# EAGLE board moodlight (EAGLE 6.5.0)
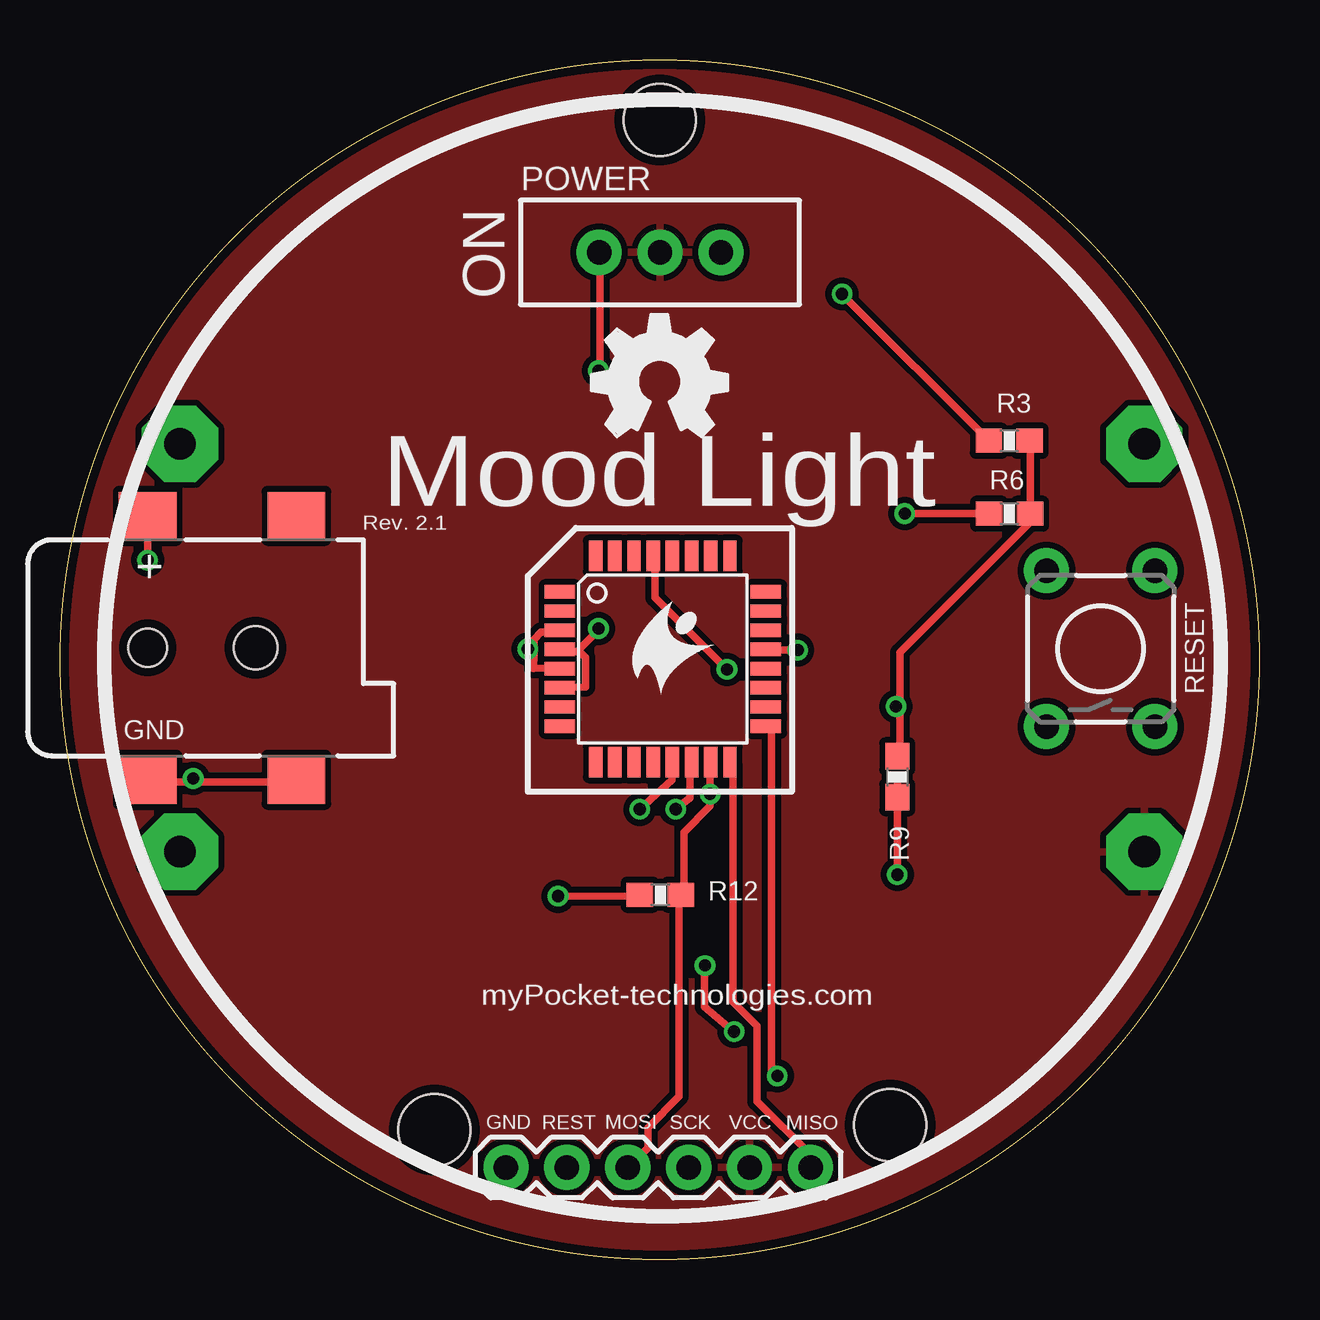
[diagram p0: board, top side]
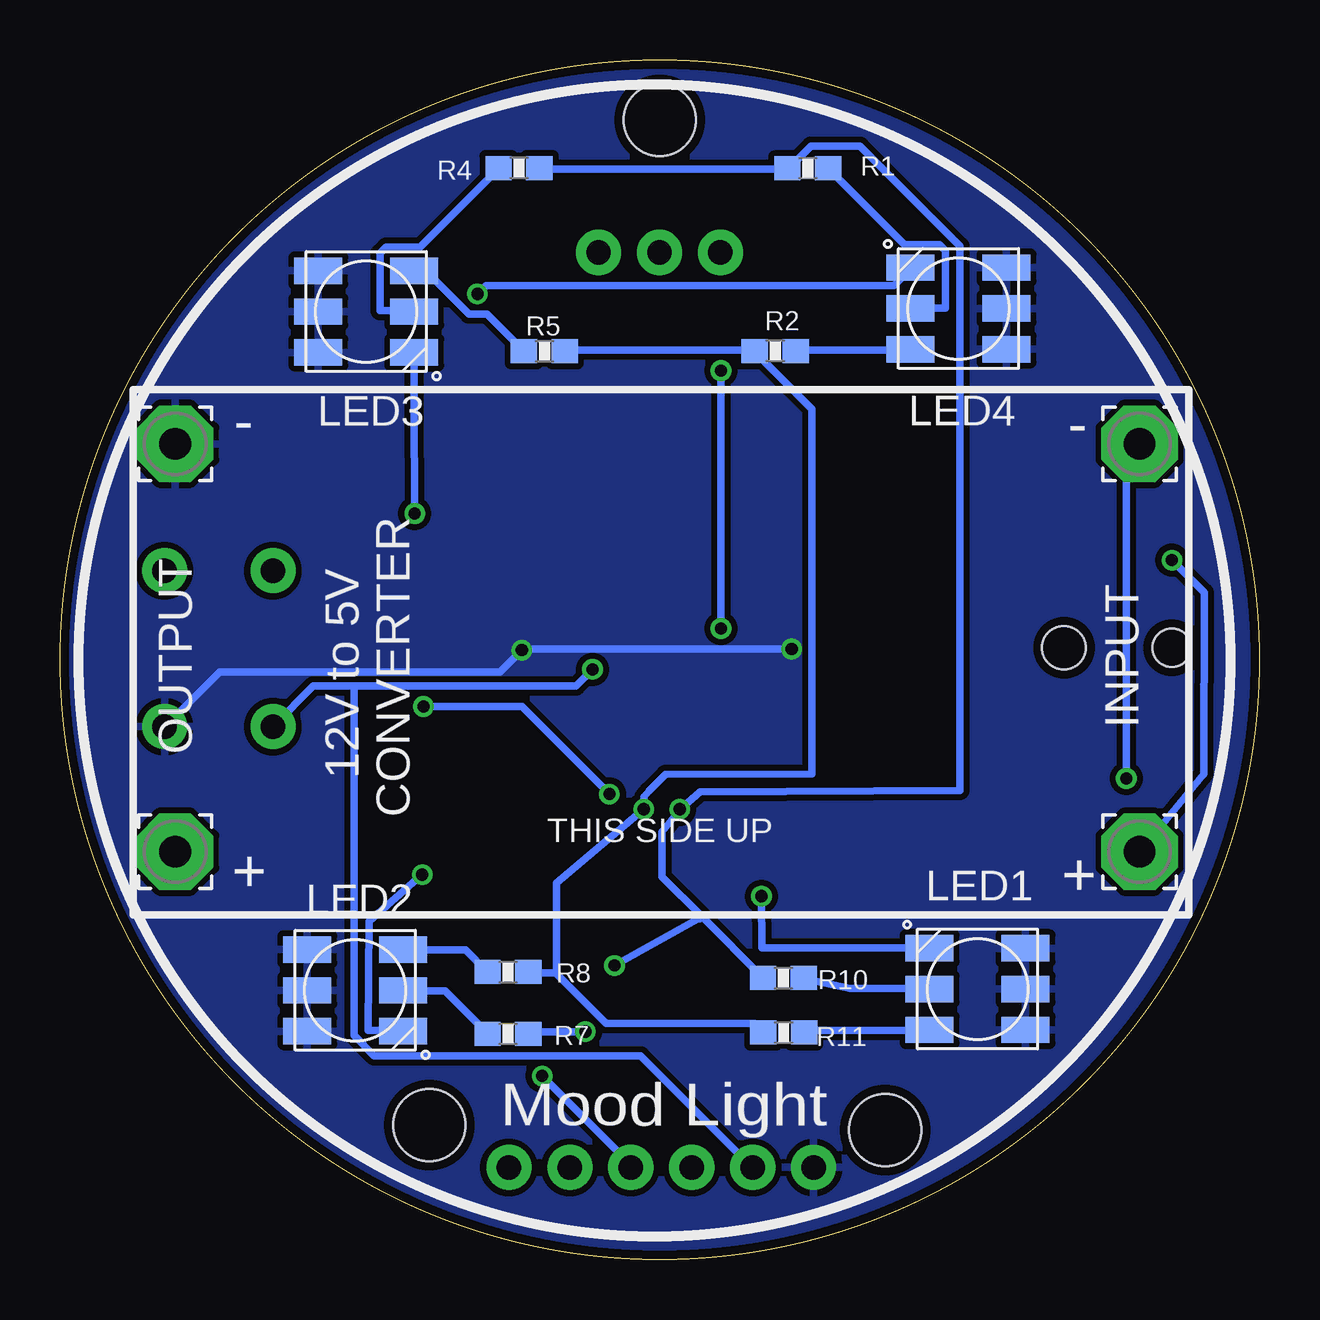
[diagram p1: board, bottom side, seen from below]

Size 50 x 50 mm. Coordinates in mm from the lower left corner, seen from the top.
Outline: circle at 25,25 radius 25
Copper layers (1*16): Top 0.0356mm / dielectric 1.5011mm / Bottom 0.0356mm
Design rules "LeanPCBORder": minimum track width 6mil, minimum drill 13mil, track to track 6mil, track to pad 6mil, pad to pad 6mil, via to via 6mil, smd to smd 6mil, copper to edge 15mil, drill to drill 6mil, minimum pad ring 7mil, minimum via ring 7mil, stop-mask expansion 4mil, vias tented up to drill 0mil, thermal gap 10mil
Net classes: 0 default: width 0.305 mm, drill 0.508 mm, clearance 0.254 mm
Holes 3 mm at 25,47.5 15.6,5.4 34.6,5.6

## Footprints (pad centres in the part's own frame; a part is rotated, then mirrored left to right if it is on the bottom)
3,17/1,3 = drill 1.321 pad 3.175 octagon: 1 0,0
1X06 = drill 1.016 pad 1.88: 1 0,0; 2 2.54,0; 3 5.08,0; 4 7.62,0; 5 10.16,0; 6 12.7,0
DCJACK_2MM_SMT = smd 2.4 x 2: GND 0,-5.5; GNDBREAK 6.2,-5.5; PWR 0,5.5; PWR2 6.2,5.5 | hole 1.6: 0,0 | hole 1.8: 4.5,0
RGBLED5050 = smd 2 x 1.1: 1 -2,1.7; 2 -2,0; 3 -2,-1.7; 4 2,-1.7; 5 2,0; 6 2,1.7
SWITCH-SPDT = drill 1.016 pad 1.88: 1 0,2.54; 2 0,0; 3 0,-2.54
0603-RES = smd 1.1 x 1: 1 -0.85,0; 2 0.85,0
TACTILE-PTH = drill 1.016 pad 1.88: 1 -3.251,2.261; 2 3.251,2.261; 3 -3.251,-2.261; 4 3.251,-2.261
TQFP32-08 = smd 1.27 x 0.559: 1 -4.293,2.8; 2 -4.293,2; 3 -4.293,1.2; 4 -4.293,0.4; 5 -4.293,-0.4; 6 -4.293,-1.2; 7 -4.293,-2; 8 -4.293,-2.8; 17 4.293,-2.8; 18 4.293,-2; 19 4.293,-1.2; 20 4.293,-0.4; 21 4.293,0.4; 22 4.293,1.2; 23 4.293,2; 24 4.293,2.8 | smd 0.559 x 1.27: 9 -2.8,-4.293; 10 -2,-4.293; 11 -1.2,-4.293; 12 -0.4,-4.293; 13 0.4,-4.293; 14 1.2,-4.293; 15 2,-4.293; 16 2.8,-4.293; 25 2.8,4.293; 26 2,4.293; 27 1.2,4.293; 28 0.4,4.293; 29 -0.4,4.293; 30 -1.2,4.293; 31 -2,4.293; 32 -2.8,4.293

## Placement (x,y rotation side)
GND  GND  [3,17/1,3]  45.2,34 0 bottom
H1  WIREPAD3,17/1,3  [3,17/1,3]  5,17 0 bottom
H2  WIREPAD3,17/1,3  [3,17/1,3]  5,34 0 bottom
ISCP  [1X06]  31.29,3.84 180 top
J1  5.5x2.1mm Barrel  [DCJACK_2MM_SMT]  3.65,25.5 0 top
LED1  RGBLED5050  [RGBLED5050]  11.75,11.27 180 bottom
LED2  RGBLED5050  [RGBLED5050]  37.7,11.22 0 bottom
LED3  RGBLED5050  [RGBLED5050]  37.23,39.51 0 bottom
LED4  RGBLED5050  [RGBLED5050]  12.55,39.64 180 bottom
POWER  5V  [SWITCH-SPDT]  25.01,41.98 90 top
R1  100  [0603-RES]  18.83,45.48 0 bottom
R2  100  [0603-RES]  20.19,37.87 180 bottom
R3  100  [0603-RES]  39.57,34.13 180 top
R4  100  [0603-RES]  30.87,45.49 0 bottom
R5  100  [0603-RES]  29.81,37.86 180 bottom
R6  100  [0603-RES]  39.58,31.09 180 top
R7  100  [0603-RES]  31.33,9.41 180 bottom
R8  100  [0603-RES]  31.33,11.98 180 bottom
R9  100  [0603-RES]  34.9,20.12 270 top
R10  100  [0603-RES]  19.85,11.74 180 bottom
R11  100  [0603-RES]  19.83,9.46 0 bottom
R12  100  [0603-RES]  25.02,15.2 0 top
RESET  [TACTILE-PTH]  43.38,25.46 90 top
U1  ATMEGA88A  [TQFP32-08]  25.13,25.03 0 top
U$1  [OSHW_FILLX200_NOTEXT]  22.15,34.31 0 top
U$2  [MYPOCKETLOGO_SM]  24.1,25.06 0 top
VCC  VCC  [3,17/1,3]  45.2,17 0 bottom

## Library data of the parts
GND H1 H2 VCC = wirepad
ISCP = SparkFun-Connectors
J1 = microbuilder
LED1-LED4 = adafruit
POWER RESET = SparkFun-Electromechanical
R1-R12 = SparkFun-Resistors; PROD_ID: RES-07866; VALUE: 220
U1 = atmel; MPN: ATMEGA8-16AU; OC_FARNELL: 9171371; OC_NEWARK: 73M8863
U$1 = ohw-logo
U$2 = mypocketlogo

## Nets
AVCC: U1.18
BLUE: ISCP.4 R3.1 R6.1 R9.1 R12.2 U1.15
BLUE_OUT_1: LED1.4 R12.1
BLUE_OUT_2: LED2.4 R9.2
BLUE_OUT_3: LED3.4 R6.2
BLUE_OUT_4: LED4.4 R3.2
GND: GND.1 ISCP.6 LED1.1 LED1.2 LED1.3 LED2.1 LED2.2 LED2.3 LED3.1 LED3.2 LED3.3 LED4.1 LED4.2 LED4.3 RESET.3 U1.3 U1.5 U1.21
GREEN: R2.2 R5.1 R8.1 R11.1 U1.14
GREEN_OUT_1: LED1.6 R11.2
GREEN_OUT_2: LED2.6 R8.2
GREEN_OUT_3: LED3.6 R5.2
GREEN_OUT_4: LED4.6 R2.1
N$1: POWER.1 U1.4 U1.6
N$2: H1.1 J1.PWR
N$9: ISCP.5 RESET.1 U1.29
N$21: ISCP.3 U1.17
N$22: ISCP.1 U1.16
N$25: H2.1 J1.GND J1.GNDBREAK
RED: R1.1 R4.2 R7.1 R10.2 U1.13
RED_OUT_1: LED1.5 R10.1
RED_OUT_2: LED2.5 R7.2
RED_OUT_3: LED3.5 R4.1
RED_OUT_4: LED4.5 R1.2
VCC: ISCP.2 POWER.2 VCC.1

## Tracks (layer width: path | path; a pad name or v marks a point on that pad's centre or on a via)
BLUE  (via drill 0.51)
  Top 0.305: U1.15 27.1,20.7 v27.1,19.4 27.1,18.9 26,17.8 26,15.3 25.9,15.2 R12.2 25.8,15.1 25.8,6.8 24.5,5.5 24.5,4.65 23.7,3.85 ISCP.4 | 35,23.05 35,25.3 40.4,30.7 40.4,31.05 R6.1 40.45,31.2 40.45,34.1 R3.1 | 35,23.05 35,21.29 34.9,21.19 R9.1 | v34.85,23.05 35,23.05
  Bottom 0.305: v27.1,19.4 30.75,23.05 v34.85,23.05
BLUE_OUT_1  (via drill 0.51)
  Top 0.305: v20.76,15.14 24.15,15.15 R12.1
  Bottom 0.305: v20.76,15.14 20.75,13 13.8,13 LED1.4
BLUE_OUT_2  (via drill 0.51)
  Top 0.305: v34.9,16.05 34.9,20.05 R9.2
  Bottom 0.305: v34.9,16.05 37.1,14.09 37.15,9.55 35.7,9.55 LED2.4
BLUE_OUT_3  (via drill 0.51)
  Top 0.305: v35.21,31.09 38.7,31.1 R6.2
  Bottom 0.305: v35.21,31.09 35.25,35.75 35.25,37.8 LED3.4
BLUE_OUT_4  (via drill 0.51)
  Top 0.305: v32.6,40.25 38.7,34.15 R3.2
  Bottom 0.305: v32.6,40.25 32.25,40.6 15.25,40.6 14.55,41.3 LED4.4
GND  (via drill 0.51)
  Top 0.305: 19.75,25.45 19.75,25.85 20.05,26.15 20.8,26.15 20.8,26.2 U1.3 | 19.75,25.45 19.75,25 19.75,24.94 19.75,24.64 20.8,24.65 U1.5 | v30.75,25.4 29.45,25.4 U1.21 | v19.5,25.45 19.75,25.45
  Bottom 0.305: RESET.3 45.6,22.25 43.35,24.5 31.65,24.5 v30.75,25.4 30.6,25.45 v19.5,25.45
  pour Bottom: -1.61,52.54 51.65,52.54 51.65,-1.88 -1.21,-1.88 -1.21,-0.81 -1.74,-0.81 -1.74,52.68
GREEN  (via drill 0.51)
  Top 0.305: v25.66,18.77 26.25,19.25 26.25,20.65 26.3,20.7 U1.14
  Bottom 0.305: R5.1 28.95,37.9 21.05,37.9 R2.2 20.95,37.75 18.65,35.45 18.65,20.25 24.75,20.23 25.45,19.53 25.65,19.27 v25.66,18.77 29.3,15.7 29.3,12.1 29.35,11.95 | 29.35,11.95 27.25,9.85 21.05,9.85 20.7,9.5 R11.1 | 29.35,11.95 30.45,11.95 R8.1
GREEN_OUT_1
  Bottom 0.305: R11.2 18.95,9.5 18.9,9.55 13.8,9.55 LED1.6
GREEN_OUT_2
  Bottom 0.305: R8.2 32.2,12 33.1,12.9 35.65,12.9 LED2.6
GREEN_OUT_3
  Bottom 0.305: R5.2 30.7,37.9 32.2,39.4 32.95,39.4 34.75,41.2 35.2,41.2 LED3.6
GREEN_OUT_4
  Bottom 0.305: R2.1 19.3,37.9 14.55,37.9 LED4.6
N$1  (via drill 0.51)
  Top 0.305: 21.65,25.35 21.9,25.1 21.9,24.2 21.91,24.16 21.91,23.86 20.85,23.85 U1.6 | 21.65,25.35 20.85,25.35 20.85,25.4 U1.4 | v22.45,26.3 22.45,26.25 21.7,25.5 21.65,25.35 | v22.45,37.05 22.5,37.1 22.5,41.95 POWER.1
  Bottom 0.305: v22.45,37.05 v22.45,26.3
N$2  (via drill 0.51)
  Top 0.305: v3.65,29.15 3.65,30.85 J1.PWR
  Bottom 0.305: v3.65,29.15 2.3,27.8 2.33,20.25 H1.1
N$9  (via drill 0.51)
  Top 0.305: v27.8,24.6 24.8,27.6 24.8,29.25 24.75,29.3 U1.29
  Bottom 0.305: v27.8,24.6 28.5,23.9 37.75,23.9 | 37.75,23.9 39.45,23.9 41.1,22.25 RESET.1 | 37.75,23.9 37.75,9.35 36.9,8.5 25.8,8.5 21.15,3.85 ISCP.5
N$21  (via drill 0.51)
  Top 0.305: v29.9,7.65 29.65,7.9 29.65,22 29.45,22.2 U1.17
  Bottom 0.305: v29.9,7.65 26.25,4 26.25,3.85 ISCP.3
N$22
  Top 0.305: U1.16 27.95,20.7 28.05,20.6 28.05,10.75 29.05,9.75 29.05,6.6 31.25,4.4 31.25,3.85 ISCP.1
N$25  (via drill 0.51)
  Top 0.305: 5.55,19.9 9.85,19.9 J1.GNDBREAK | 5.55,19.9 3.7,19.9 J1.GND | v5.55,20.05 5.55,19.9
  Bottom 0.305: v5.55,20.05 5.55,34 H2.1
RED  (via drill 0.51)
  Top 0.305: v24.17,18.77 25.5,20 25.5,20.7 U1.13 | v26.89,12.25 26.87,11.66 26.87,10.52 v28.1,9.5
  Bottom 0.305: R4.2 30,45.45 19.7,45.45 R1.1 19.55,45.55 18.7,46.4 16.65,46.4 12.5,42.25 12.5,19.55 23.32,19.5 v24.17,18.77 24.91,17.83 24.91,16.66 24.9,15.95 23.25,14.3 | 23.25,14.3 R10.2 | v28.1,9.5 30.4,9.5 30.45,9.45 R7.1 | v26.89,12.25 23.4,14.2 23.35,14.2 23.25,14.3
RED_OUT_1
  Bottom 0.305: R10.1 18.95,11.7 17.06,11.3 13.8,11.3 LED1.5
RED_OUT_2
  Bottom 0.305: R7.2 32.2,9.45 33.95,11.2 35.65,11.2 LED2.5
RED_OUT_3
  Bottom 0.305: R4.1 31.75,45.45 35,42.2 36.4,42.2 36.65,41.95 36.65,39.55 35.25,39.55 LED3.5
RED_OUT_4
  Bottom 0.305: R1.2 17.95,45.45 14.8,42.3 13.35,42.3 13.1,42.05 13.1,39.65 14.5,39.65 LED4.5
VCC
  pour Top: -3.42,54.2 53.76,53.94 52.73,-2.44 -3.17,-2.62

## Text on the board
tNames: ON | Mood Light | Rev. 2.1 | myPocket-technologies.com | GND | REST | MOSI | SCK | VCC | MISO
bNames: - | - | INPUT | 12V to 5V / CONVERTER | OUTPUT | THIS SIDE UP | + | + | Mood Light